# Altium PCB STC89C52RC_2021-12-16.pcbdoc
Units mm, origin at the board's own origin, x right, y up, seen from the top; angles counter-clockwise.
Board outline 40.13 x 39.12 mm, 2 copper layers (Top Layer, Bottom Layer); 1 components, 0 nets, 44 pads, 0 vias.
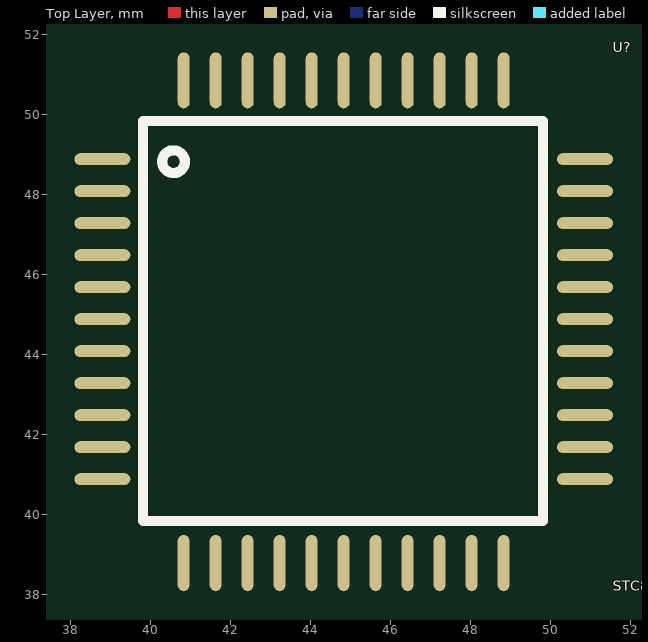
[diagram p0: Top Layer view]
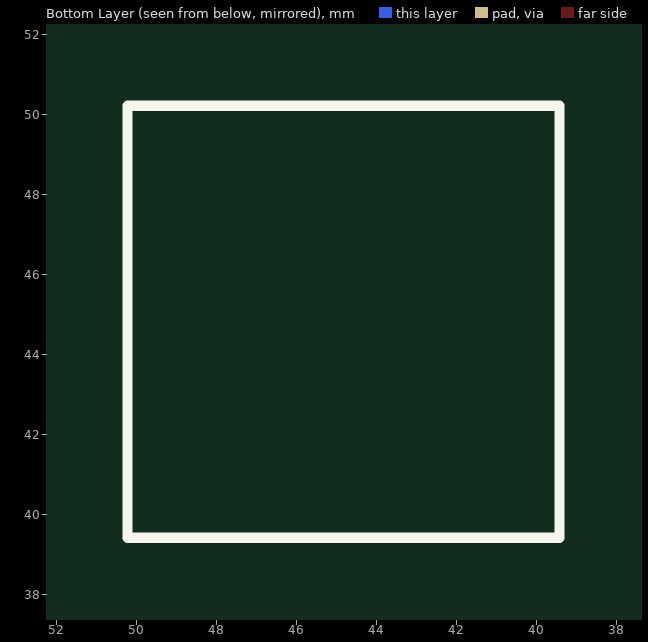
[diagram p1: Bottom Layer view, seen from below]

## Layer stack, top to bottom
Top Layer: signal copper (thickness not stored)
Dielectric: dielectric 0.32, FR-4, Dk 4.8
Bottom Layer: signal copper (thickness not stored)

## Board outline
65.535,25.4 25.4,25.4 25.4,64.519 65.535,64.519

## Components (designator, comment, footprint, x,y, rotation, side; value= is the part's Value field where it differs from the comment)
U? "STC89C52RC" STC89C52RC 44.832,44.832 r0 top

## Footprints (in the part's own frame and the unit in brackets; to place one, negate y for a bottom-side part, rotate by r counter-clockwise, add the part's x,y. Pads: shape width x height; smd on the part's side, far side on the other; paste and mask are expansions set on the pad)
STC89C52RC [mm]
  oval 1.4x0.3 smd: 1(6.032,4.063) 3(6.032,3.263) 4(6.032,2.463) 5(6.032,1.663) 6(6.032,0.863) 7(6.032,0.064) 8(6.032,-0.736) 9(6.032,-1.536) 10(6.032,-2.336) 11(6.032,-3.136) 12(6.032,-3.936) 26(-6.032,-3.936) 27(-6.032,-3.136) 28(-6.032,-2.336) 29(-6.032,-1.536) 30(-6.032,-0.736) 31(-6.032,0.064) 32(-6.032,0.863) 33(-6.032,1.663) 34(-6.032,2.464) 35(-6.032,3.263) 36(-6.032,4.064)
  oval 0.3x1.4 smd: 14(3.999,-6.032) 15(3.199,-6.032) 16(2.399,-6.032) 17(1.599,-6.032) 18(0.799,-6.032) 19(-0.001,-6.032) 20(-0.801,-6.032) 21(-2.401,-6.032) 22(-1.601,-6.032) 23(-3.201,-6.032) 24(-4,-6.032) 39(-4,6.032) 40(-3.199,6.032) 41(-2.4,6.032) 42(-1.599,6.032) 43(-0.8,6.032) 44(0,6.032) 45(0.801,6.032) 46(1.6,6.032) 47(2.401,6.032) 48(3.2,6.032) 49(4,6.032)
  silkscreen extent -5.02,-4.98 4.98,5.02

## Nets (pads, with @x,y where several pads share a name; then routed paths per layer and width w, separated by ;. In a path a pad name is that pad's centre, name@x,y a point inside that pad or via, vN(x,y) a via of type N, cw(c..) or ccw(c..) an arc to the next point about the centre after c; other vN are vias at no path point)
pads on no net: U?.1 U?.3 U?.4 U?.5 U?.6 U?.7 U?.8 U?.9 U?.10 U?.11 U?.12 U?.14 U?.15 U?.16 U?.17 U?.18 U?.19 U?.20 U?.21 U?.22 U?.23 U?.24 U?.26 U?.27 U?.28 U?.29 U?.30 U?.31 U?.32 U?.33 U?.34 U?.35 U?.36 U?.39 U?.40 U?.41 U?.42 U?.43 U?.44 U?.45 U?.46 U?.47 U?.48 U?.49

## Silkscreen, mask and mechanical layers (free items; w line width, h text height)
Document:
  lines w0.003: 45.442,44.934 45.493,44.985